# EAGLE board SparkFun RTK Facet - External Connector-Panel (EAGLE 9.6.2), part 1 of 2
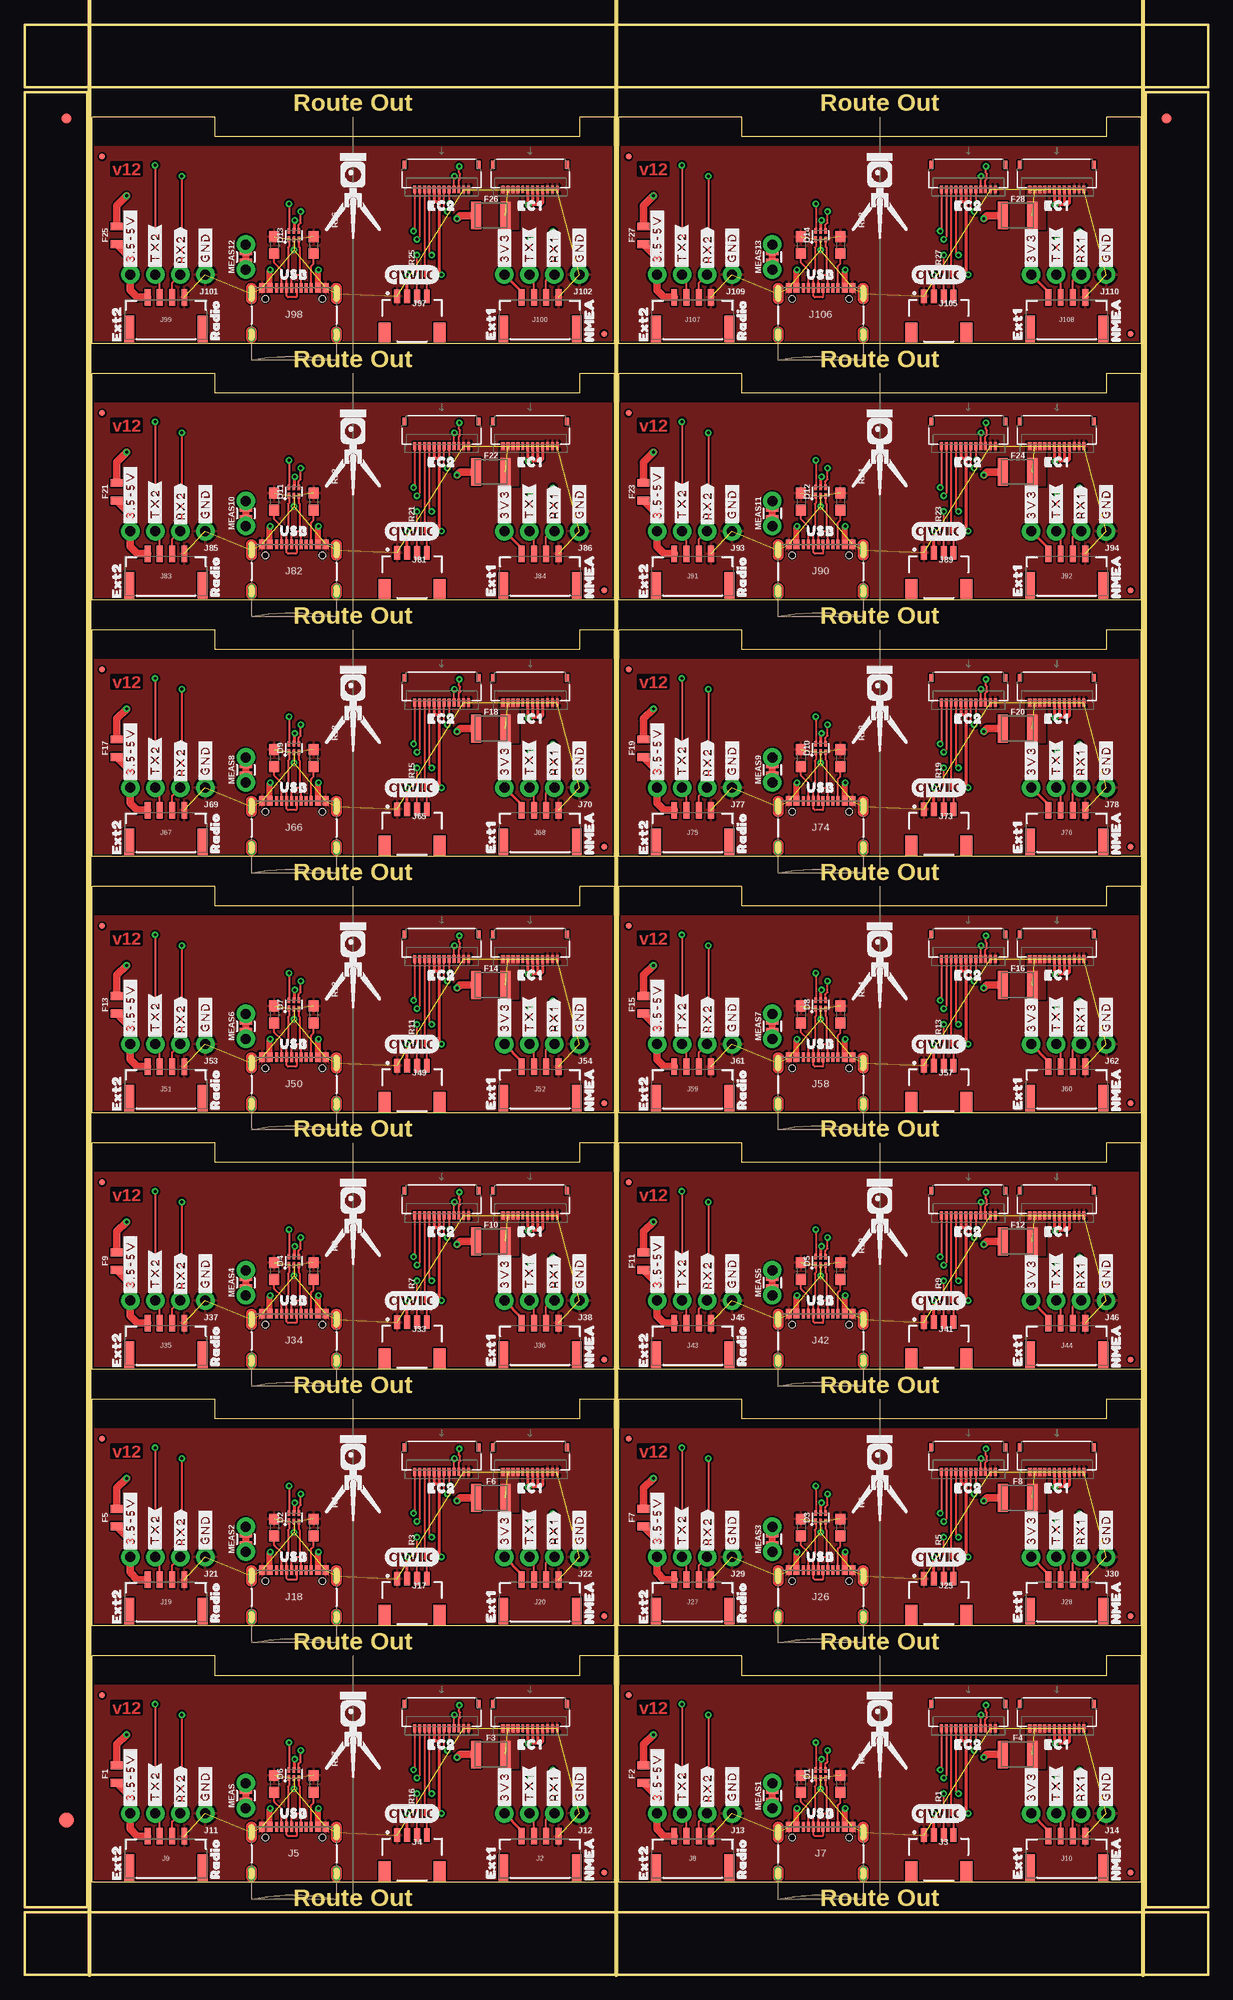
[diagram p0: board, top side]
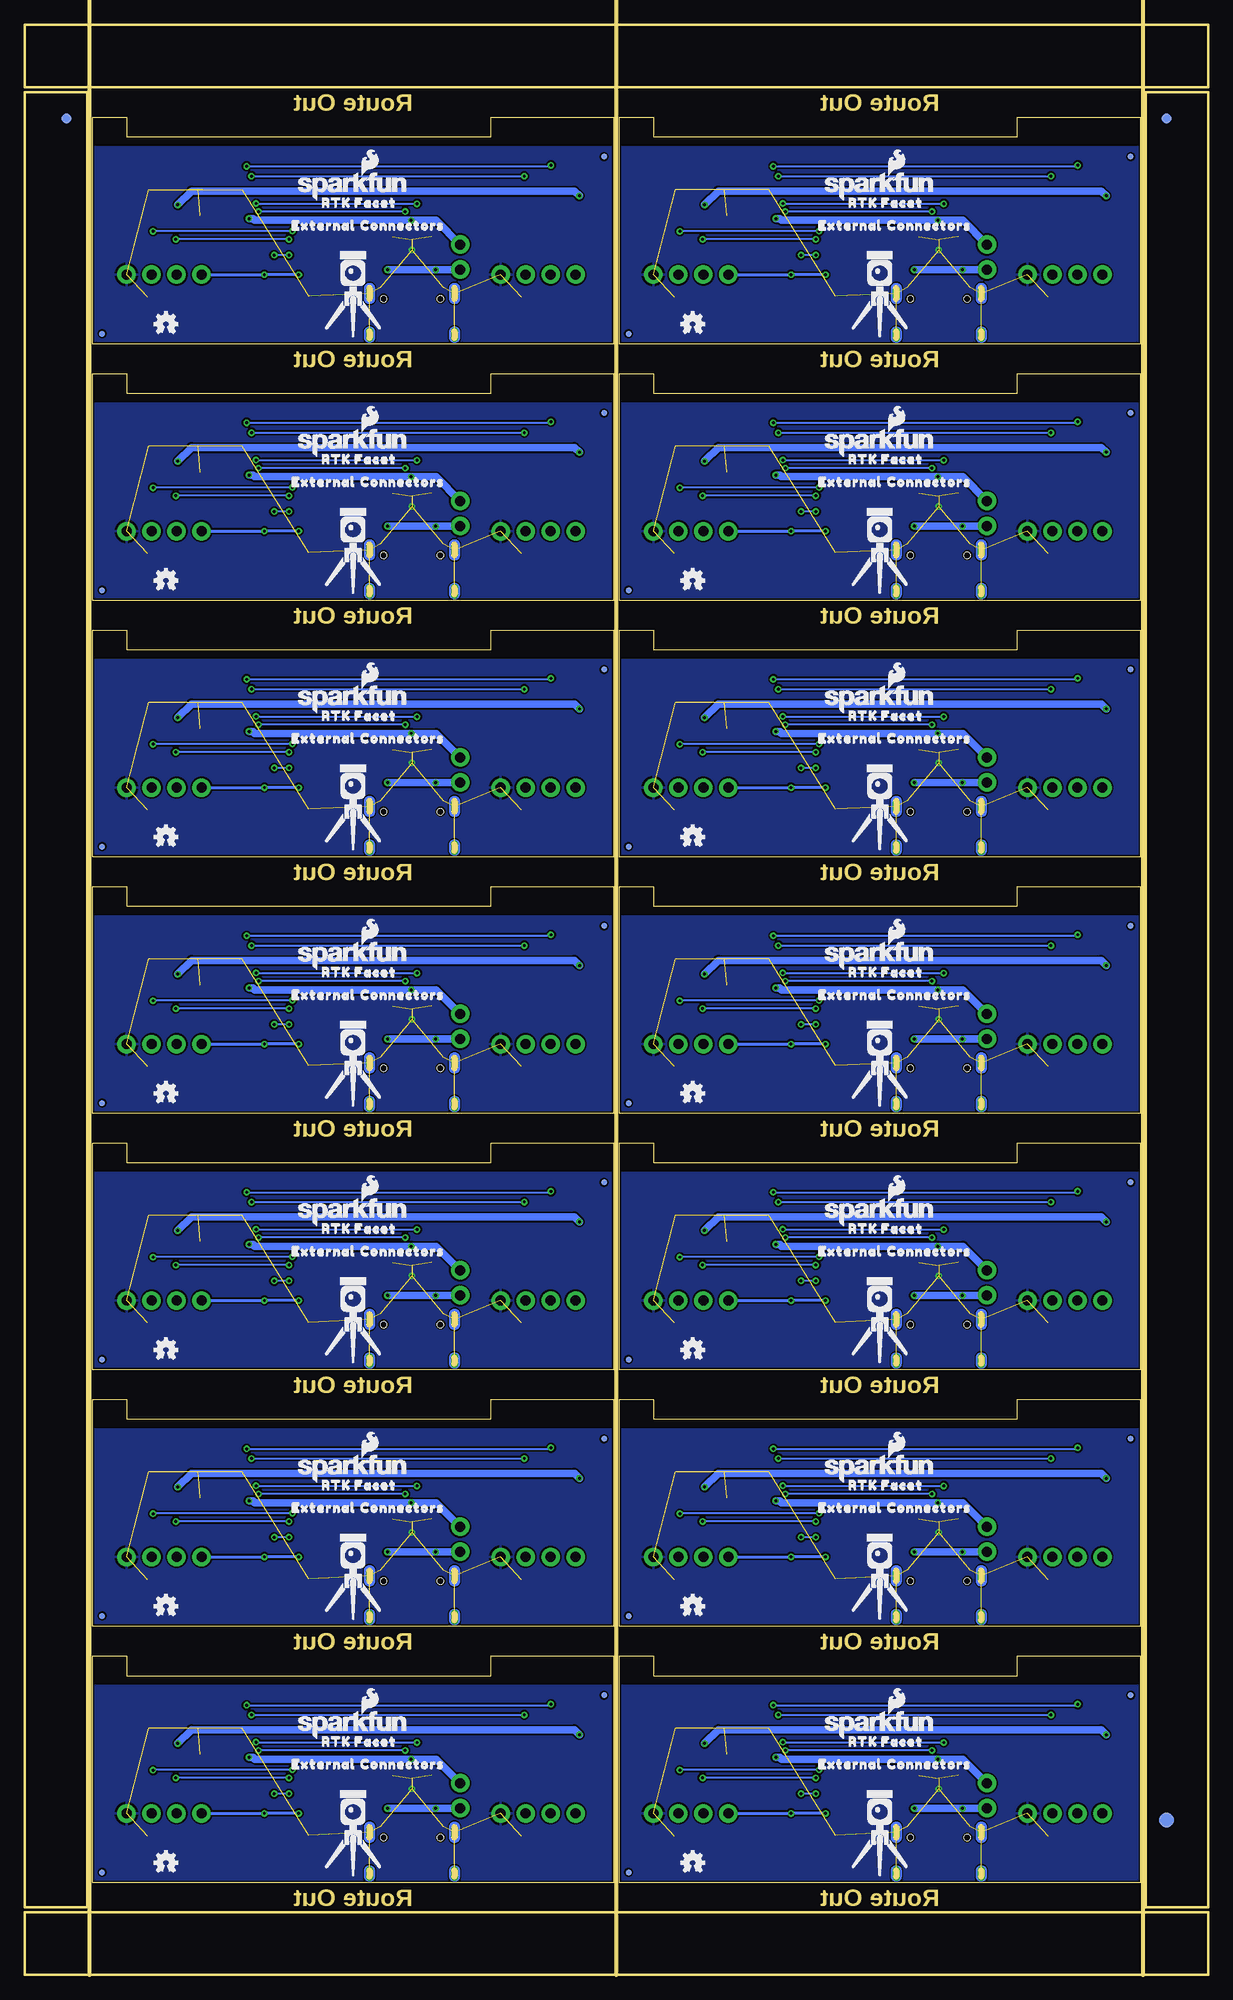
[diagram p1: board, bottom side, seen from below]

Size 120.22 x 198.08 mm. Coordinates in mm from the lower left corner, seen from the top.
Outline: 59.86,32.4 59.86,9.4 6.86,9.4 6.86,32.4 19.36,32.4 19.36,30.4 56.36,30.4 56.36,32.4 59.86,32.4
Outline: 113.37,32.4 113.37,9.4 60.37,9.4 60.37,32.4 72.87,32.4 72.87,30.4 109.87,30.4 109.87,32.4 113.37,32.4
Outline: 59.86,58.45 59.86,35.45 6.86,35.45 6.86,58.45 19.36,58.45 19.36,56.45 56.36,56.45 56.36,58.45 59.86,58.45
Outline: 113.37,58.45 113.37,35.45 60.37,35.45 60.37,58.45 72.87,58.45 72.87,56.45 109.87,56.45 109.87,58.45 113.37,58.45
Outline: 59.86,84.49 59.86,61.49 6.86,61.49 6.86,84.49 19.36,84.49 19.36,82.49 56.36,82.49 56.36,84.49 59.86,84.49
Outline: 113.37,84.49 113.37,61.49 60.37,61.49 60.37,84.49 72.87,84.49 72.87,82.49 109.87,82.49 109.87,84.49 113.37,84.49
Outline: 59.86,110.54 59.86,87.54 6.86,87.54 6.86,110.54 19.36,110.54 19.36,108.54 56.36,108.54 56.36,110.54 59.86,110.54
Outline: 113.37,110.54 113.37,87.54 60.37,87.54 60.37,110.54 72.87,110.54 72.87,108.54 109.87,108.54 109.87,110.54 113.37,110.54
Outline: 59.86,136.59 59.86,113.59 6.86,113.59 6.86,136.59 19.36,136.59 19.36,134.59 56.36,134.59 56.36,136.59 59.86,136.59
Outline: 113.37,136.59 113.37,113.59 60.37,113.59 60.37,136.59 72.87,136.59 72.87,134.59 109.87,134.59 109.87,136.59 113.37,136.59
Outline: 59.86,162.64 59.86,139.64 6.86,139.64 6.86,162.64 19.36,162.64 19.36,160.64 56.36,160.64 56.36,162.64 59.86,162.64
Outline: 113.37,162.64 113.37,139.64 60.37,139.64 60.37,162.64 72.87,162.64 72.87,160.64 109.87,160.64 109.87,162.64 113.37,162.64
Outline: 59.86,188.69 59.86,165.69 6.86,165.69 6.86,188.69 19.36,188.69 19.36,186.69 56.36,186.69 56.36,188.69 59.86,188.69
Outline: 113.37,188.69 113.37,165.69 60.37,165.69 60.37,188.69 72.87,188.69 72.87,186.69 109.87,186.69 109.87,188.69 113.37,188.69
Outline: 0,6.35 120.22,6.35 120.22,0 0,0 0,6.35
Outline: 113.87,191.23 120.22,191.23 120.22,6.86 113.87,6.86 113.87,191.23
Outline: 0,198.08 120.22,198.08 120.22,191.73 0,191.73 0,198.08
Outline: 0,191.23 6.35,191.23 6.35,6.86 0,6.86 0,191.23
Copper layers (1*16): Top 0.035mm / dielectric 1.5mm / Bottom 0.035mm
Design rules "SparkFun RTK Facet - External Connector": minimum track width 7mil, minimum drill 0.3mm, track to track 7mil, track to pad 7mil, pad to pad 7mil, via to via 7mil, smd to smd 7mil, copper to edge 7mil, drill to drill 7mil, minimum pad ring 7mil, minimum via ring 7mil, stop-mask expansion 4mil, vias tented up to drill 25mil, thermal gap 10mil
Net classes: 1 power: width 0.305 mm
tKeepout: area 6.9,9.4 to 8.9,29.4; area 60.4,9.4 to 62.4,29.4; area 6.9,35.4 to 8.9,55.4; area 60.4,35.4 to 62.4,55.4; area 6.9,61.5 to 8.9,81.5; area 60.4,61.5 to 62.4,81.5; area 6.9,87.5 to 8.9,107.5; area 60.4,87.5 to 62.4,107.5; area 6.9,113.6 to 8.9,133.6; area 60.4,113.6 to 62.4,133.6; area 6.9,139.6 to 8.9,159.6; area 60.4,139.6 to 62.4,159.6; area 6.9,165.7 to 8.9,185.7; area 60.4,165.7 to 62.4,185.7
bKeepout: area 54.4,9.4 to 56.4,29.4; area 6.9,9.4 to 8.9,29.4; area 107.9,9.4 to 109.9,29.4; area 60.4,9.4 to 62.4,29.4; area 54.4,35.4 to 56.4,55.4; area 6.9,35.4 to 8.9,55.4; area 107.9,35.4 to 109.9,55.4; area 60.4,35.4 to 62.4,55.4; area 54.4,61.5 to 56.4,81.5; area 6.9,61.5 to 8.9,81.5; area 107.9,61.5 to 109.9,81.5; area 60.4,61.5 to 62.4,81.5; area 54.4,87.5 to 56.4,107.5; area 6.9,87.5 to 8.9,107.5; area 107.9,87.5 to 109.9,107.5; area 60.4,87.5 to 62.4,107.5; area 54.4,113.6 to 56.4,133.6; area 6.9,113.6 to 8.9,133.6; area 107.9,113.6 to 109.9,133.6; area 60.4,113.6 to 62.4,133.6; area 54.4,139.6 to 56.4,159.6; area 6.9,139.6 to 8.9,159.6; area 107.9,139.6 to 109.9,159.6; area 60.4,139.6 to 62.4,159.6; area 54.4,165.7 to 56.4,185.7; area 6.9,165.7 to 8.9,185.7; area 107.9,165.7 to 109.9,185.7; area 60.4,165.7 to 62.4,185.7
Milling: 3 lines

## Footprints (pad centres in the part's own frame; a part is rotated, then mirrored left to right if it is on the bottom)
SOT886 = smd 0.61 x 0.25: 1 -0.405,0.5 | smd 0.56 x 0.25: 2 -0.43,0; 3 -0.43,-0.5; 4 0.43,-0.5; 5 0.43,0; 6 0.43,0.5
FIDUCIAL-1X2 = smd 1 x 1: 1 0,0
FIDUCIAL-1.5X3 = smd 1.5 x 1.5: 1 0,0
0805 = smd 0.8 x 1.2: 1 -0.9,0; 2 0.9,0
1210 = smd 1 x 2.8: 1 -1.5,0; 2 1.5,0
FPC_12_DOUBLESIDED_BACKFLIP = smd 0.3 x 0.8: 1 -2.75,1.35; 2 -2.25,1.35; 3 -1.75,1.35; 4 -1.25,1.35; 5 -0.75,1.35; 6 -0.25,1.35; 7 0.25,1.35; 8 0.75,1.35; 9 1.25,1.35; 10 1.75,1.35; 11 2.25,1.35; 12 2.75,1.35 | smd 0.4 x 0.8: MP1 -3.75,-1.15; MP2 3.75,-1.15
JST-4-SMD-1.25MM-LOCKING = smd 0.6 x 1.7: 1 -1.875,3.3; 2 -0.625,3.3; 3 0.625,3.3; 4 1.875,3.3 | smd 1 x 2.7: NC1 3.725,0.1; NC2 -3.725,0.1
JST04_1MM_RA = smd 0.6 x 1.35: 1 -1.5,0; 2 -0.5,0; 3 0.5,0; 4 1.5,0 | smd 1.2 x 2: NC1 2.8,-3.675; NC2 -2.8,-3.675
USB-C-16P-2LAYER-PADS = smd 0.3 x 1: A5 -1.25,-0.34; A6 -0.25,-0.34; A7 0.25,-0.34; A8 1.25,-0.34; B5 1.75,-0.34; B6 0.75,-0.34; B7 -0.75,-0.34; B8 -1.75,-0.34 | smd 0.6 x 1: GND -3.225,-0.34; GND2 3.225,-0.34; VBUS1 -2.45,-0.34; VBUS2 2.45,-0.34 | drill 0.4 pad 0.6 long: SHLD1 -4.318,-0.915; SHLD2 4.318,-0.915; SHLD3 -4.318,-5.095; SHLD4 4.318,-5.095 | hole 0.65: -2.89,-1.445; 2.89,-1.445
1X04_NO_SILK = drill 1.016 pad 1.88: 1 0,0; 2 2.54,0; 3 5.08,0; 4 7.62,0
FIDUCIAL-MICRO = smd 0.635 x 0.635: 1 0,0
COMBO-JUMPER_2_NC_TRACE = smd 0.635 x 1.27: 1 -0.508,0; 2 0.508,0 | drill 1.016 pad 1.88: 3 -1.27,0; 4 1.27,0
0603 = smd 1.1 x 1: 1 -0.85,0; 2 0.85,0

## Placement (x,y rotation side)
D1  PRTR5V0U2F  [SOT886]  80.87,20.4 90 top
D2  PRTR5V0U2F  [SOT886]  27.36,46.45 90 top
D3  PRTR5V0U2F  [SOT886]  80.87,46.45 90 top
D4  PRTR5V0U2F  [SOT886]  27.36,72.49 90 top
D5  PRTR5V0U2F  [SOT886]  80.87,72.49 90 top
D6  PRTR5V0U2F  [SOT886]  27.36,20.4 90 top
D7  PRTR5V0U2F  [SOT886]  27.36,98.54 90 top
D8  PRTR5V0U2F  [SOT886]  80.87,98.54 90 top
D9  PRTR5V0U2F  [SOT886]  27.36,124.59 90 top
D10  PRTR5V0U2F  [SOT886]  80.87,124.59 90 top
D11  PRTR5V0U2F  [SOT886]  27.36,150.64 90 top
D12  PRTR5V0U2F  [SOT886]  80.87,150.64 90 top
D13  PRTR5V0U2F  [SOT886]  27.36,176.69 90 top
D14  PRTR5V0U2F  [SOT886]  80.87,176.69 90 top
E$1  [FIDUCIAL-1X2]  4.23,188.56 0 top
E$2  [FIDUCIAL-1X2]  4.23,188.56 0 bottom
E$3  [FIDUCIAL-1X2]  115.99,188.56 0 top
E$4  [FIDUCIAL-1X2]  115.99,188.56 0 bottom
E$5  [FIDUCIAL-1.5X3]  4.23,15.75 0 top
E$6  [FIDUCIAL-1.5X3]  4.23,15.75 0 bottom
F1  6V 0.5A  [0805]  9.36,20.4 90 top
F2  6V 0.5A  [0805]  62.87,20.4 90 top
F3  6V/2A  [1210]  47.36,22.4 0 top
F4  6V/2A  [1210]  100.87,22.4 0 top
F5  6V 0.5A  [0805]  9.36,46.45 90 top
F6  6V/2A  [1210]  47.36,48.45 0 top
F7  6V 0.5A  [0805]  62.87,46.45 90 top
F8  6V/2A  [1210]  100.87,48.45 0 top
F9  6V 0.5A  [0805]  9.36,72.49 90 top
F10  6V/2A  [1210]  47.36,74.49 0 top
F11  6V 0.5A  [0805]  62.87,72.49 90 top
F12  6V/2A  [1210]  100.87,74.49 0 top
F13  6V 0.5A  [0805]  9.36,98.54 90 top
F14  6V/2A  [1210]  47.36,100.54 0 top
F15  6V 0.5A  [0805]  62.87,98.54 90 top
F16  6V/2A  [1210]  100.87,100.54 0 top
F17  6V 0.5A  [0805]  9.36,124.59 90 top
F18  6V/2A  [1210]  47.36,126.59 0 top
F19  6V 0.5A  [0805]  62.87,124.59 90 top
F20  6V/2A  [1210]  100.87,126.59 0 top
F21  6V 0.5A  [0805]  9.36,150.64 90 top
F22  6V/2A  [1210]  47.36,152.64 0 top
F23  6V 0.5A  [0805]  62.87,150.64 90 top
F24  6V/2A  [1210]  100.87,152.64 0 top
F25  6V 0.5A  [0805]  9.36,176.69 90 top
F26  6V/2A  [1210]  47.36,178.69 0 top
F27  6V 0.5A  [0805]  62.87,176.69 90 top
F28  6V/2A  [1210]  100.87,178.69 0 top
J1  FPC_12_0.5MM_BACKFLIP  [FPC_12_DOUBLESIDED_BACKFLIP]  51.36,26.4 180 top
J2  [JST-4-SMD-1.25MM-LOCKING]  52.36,10.8 0 top
J3  Qwiic  [JST04_1MM_RA]  92.87,14.2 0 top
J4  Qwiic  [JST04_1MM_RA]  39.36,14.2 0 top
J5  u-blox USB  [USB-C-16P-2LAYER-PADS]  27.36,15.4 0 top
J6  FPC_12_0.5MM_BACKFLIP  [FPC_12_DOUBLESIDED_BACKFLIP]  42.36,26.4 180 top
J7  u-blox USB  [USB-C-16P-2LAYER-PADS]  80.87,15.4 0 top
J8  [JST-4-SMD-1.25MM-LOCKING]  67.87,10.8 0 top
J9  [JST-4-SMD-1.25MM-LOCKING]  14.36,10.8 0 top
J10  [JST-4-SMD-1.25MM-LOCKING]  105.87,10.8 0 top
J11  [1X04_NO_SILK]  18.36,16.4 180 top
J12  [1X04_NO_SILK]  56.36,16.4 180 top
J13  [1X04_NO_SILK]  71.87,16.4 180 top
J14  [1X04_NO_SILK]  109.87,16.4 180 top
J15  FPC_12_0.5MM_BACKFLIP  [FPC_12_DOUBLESIDED_BACKFLIP]  104.87,26.4 180 top
J16  FPC_12_0.5MM_BACKFLIP  [FPC_12_DOUBLESIDED_BACKFLIP]  95.87,26.4 180 top
J17  Qwiic  [JST04_1MM_RA]  39.36,40.25 0 top
J18  u-blox USB  [USB-C-16P-2LAYER-PADS]  27.36,41.45 0 top
J19  [JST-4-SMD-1.25MM-LOCKING]  14.36,36.85 0 top
J20  [JST-4-SMD-1.25MM-LOCKING]  52.36,36.85 0 top
J21  [1X04_NO_SILK]  18.36,42.45 180 top
J22  [1X04_NO_SILK]  56.36,42.45 180 top
J23  FPC_12_0.5MM_BACKFLIP  [FPC_12_DOUBLESIDED_BACKFLIP]  51.36,52.45 180 top
J24  FPC_12_0.5MM_BACKFLIP  [FPC_12_DOUBLESIDED_BACKFLIP]  42.36,52.45 180 top
J25  Qwiic  [JST04_1MM_RA]  92.87,40.25 0 top
J26  u-blox USB  [USB-C-16P-2LAYER-PADS]  80.87,41.45 0 top
J27  [JST-4-SMD-1.25MM-LOCKING]  67.87,36.85 0 top
J28  [JST-4-SMD-1.25MM-LOCKING]  105.87,36.85 0 top
J29  [1X04_NO_SILK]  71.87,42.45 180 top
J30  [1X04_NO_SILK]  109.87,42.45 180 top
J31  FPC_12_0.5MM_BACKFLIP  [FPC_12_DOUBLESIDED_BACKFLIP]  104.87,52.45 180 top
J32  FPC_12_0.5MM_BACKFLIP  [FPC_12_DOUBLESIDED_BACKFLIP]  95.87,52.45 180 top
J33  Qwiic  [JST04_1MM_RA]  39.36,66.29 0 top
J34  u-blox USB  [USB-C-16P-2LAYER-PADS]  27.36,67.49 0 top
J35  [JST-4-SMD-1.25MM-LOCKING]  14.36,62.89 0 top
J36  [JST-4-SMD-1.25MM-LOCKING]  52.36,62.89 0 top
J37  [1X04_NO_SILK]  18.36,68.49 180 top
J38  [1X04_NO_SILK]  56.36,68.49 180 top
J39  FPC_12_0.5MM_BACKFLIP  [FPC_12_DOUBLESIDED_BACKFLIP]  51.36,78.49 180 top
J40  FPC_12_0.5MM_BACKFLIP  [FPC_12_DOUBLESIDED_BACKFLIP]  42.36,78.49 180 top
J41  Qwiic  [JST04_1MM_RA]  92.87,66.29 0 top
J42  u-blox USB  [USB-C-16P-2LAYER-PADS]  80.87,67.49 0 top
J43  [JST-4-SMD-1.25MM-LOCKING]  67.87,62.89 0 top
J44  [JST-4-SMD-1.25MM-LOCKING]  105.87,62.89 0 top
J45  [1X04_NO_SILK]  71.87,68.49 180 top
J46  [1X04_NO_SILK]  109.87,68.49 180 top
J47  FPC_12_0.5MM_BACKFLIP  [FPC_12_DOUBLESIDED_BACKFLIP]  104.87,78.49 180 top
J48  FPC_12_0.5MM_BACKFLIP  [FPC_12_DOUBLESIDED_BACKFLIP]  95.87,78.49 180 top
J49  Qwiic  [JST04_1MM_RA]  39.36,92.34 0 top
J50  u-blox USB  [USB-C-16P-2LAYER-PADS]  27.36,93.54 0 top
J51  [JST-4-SMD-1.25MM-LOCKING]  14.36,88.94 0 top
J52  [JST-4-SMD-1.25MM-LOCKING]  52.36,88.94 0 top
J53  [1X04_NO_SILK]  18.36,94.54 180 top
J54  [1X04_NO_SILK]  56.36,94.54 180 top
J55  FPC_12_0.5MM_BACKFLIP  [FPC_12_DOUBLESIDED_BACKFLIP]  51.36,104.54 180 top
J56  FPC_12_0.5MM_BACKFLIP  [FPC_12_DOUBLESIDED_BACKFLIP]  42.36,104.54 180 top
J57  Qwiic  [JST04_1MM_RA]  92.87,92.34 0 top
J58  u-blox USB  [USB-C-16P-2LAYER-PADS]  80.87,93.54 0 top
J59  [JST-4-SMD-1.25MM-LOCKING]  67.87,88.94 0 top
J60  [JST-4-SMD-1.25MM-LOCKING]  105.87,88.94 0 top
J61  [1X04_NO_SILK]  71.87,94.54 180 top
J62  [1X04_NO_SILK]  109.87,94.54 180 top
J63  FPC_12_0.5MM_BACKFLIP  [FPC_12_DOUBLESIDED_BACKFLIP]  104.87,104.54 180 top
J64  FPC_12_0.5MM_BACKFLIP  [FPC_12_DOUBLESIDED_BACKFLIP]  95.87,104.54 180 top
J65  Qwiic  [JST04_1MM_RA]  39.36,118.39 0 top
J66  u-blox USB  [USB-C-16P-2LAYER-PADS]  27.36,119.59 0 top
J67  [JST-4-SMD-1.25MM-LOCKING]  14.36,114.99 0 top
J68  [JST-4-SMD-1.25MM-LOCKING]  52.36,114.99 0 top
J69  [1X04_NO_SILK]  18.36,120.59 180 top
J70  [1X04_NO_SILK]  56.36,120.59 180 top
J71  FPC_12_0.5MM_BACKFLIP  [FPC_12_DOUBLESIDED_BACKFLIP]  51.36,130.59 180 top
J72  FPC_12_0.5MM_BACKFLIP  [FPC_12_DOUBLESIDED_BACKFLIP]  42.36,130.59 180 top
J73  Qwiic  [JST04_1MM_RA]  92.87,118.39 0 top
J74  u-blox USB  [USB-C-16P-2LAYER-PADS]  80.87,119.59 0 top
J75  [JST-4-SMD-1.25MM-LOCKING]  67.87,114.99 0 top
J76  [JST-4-SMD-1.25MM-LOCKING]  105.87,114.99 0 top
J77  [1X04_NO_SILK]  71.87,120.59 180 top
J78  [1X04_NO_SILK]  109.87,120.59 180 top
J79  FPC_12_0.5MM_BACKFLIP  [FPC_12_DOUBLESIDED_BACKFLIP]  104.87,130.59 180 top
J80  FPC_12_0.5MM_BACKFLIP  [FPC_12_DOUBLESIDED_BACKFLIP]  95.87,130.59 180 top
J81  Qwiic  [JST04_1MM_RA]  39.36,144.44 0 top
J82  u-blox USB  [USB-C-16P-2LAYER-PADS]  27.36,145.64 0 top
J83  [JST-4-SMD-1.25MM-LOCKING]  14.36,141.04 0 top
J84  [JST-4-SMD-1.25MM-LOCKING]  52.36,141.04 0 top
J85  [1X04_NO_SILK]  18.36,146.64 180 top
J86  [1X04_NO_SILK]  56.36,146.64 180 top
J87  FPC_12_0.5MM_BACKFLIP  [FPC_12_DOUBLESIDED_BACKFLIP]  51.36,156.64 180 top
J88  FPC_12_0.5MM_BACKFLIP  [FPC_12_DOUBLESIDED_BACKFLIP]  42.36,156.64 180 top
J89  Qwiic  [JST04_1MM_RA]  92.87,144.44 0 top
J90  u-blox USB  [USB-C-16P-2LAYER-PADS]  80.87,145.64 0 top
J91  [JST-4-SMD-1.25MM-LOCKING]  67.87,141.04 0 top
J92  [JST-4-SMD-1.25MM-LOCKING]  105.87,141.04 0 top
J93  [1X04_NO_SILK]  71.87,146.64 180 top
J94  [1X04_NO_SILK]  109.87,146.64 180 top
J95  FPC_12_0.5MM_BACKFLIP  [FPC_12_DOUBLESIDED_BACKFLIP]  104.87,156.64 180 top
J96  FPC_12_0.5MM_BACKFLIP  [FPC_12_DOUBLESIDED_BACKFLIP]  95.87,156.64 180 top
J97  Qwiic  [JST04_1MM_RA]  39.36,170.49 0 top
J98  u-blox USB  [USB-C-16P-2LAYER-PADS]  27.36,171.69 0 top
J99  [JST-4-SMD-1.25MM-LOCKING]  14.36,167.09 0 top
J100  [JST-4-SMD-1.25MM-LOCKING]  52.36,167.09 0 top
J101  [1X04_NO_SILK]  18.36,172.69 180 top
J102  [1X04_NO_SILK]  56.36,172.69 180 top
J103  FPC_12_0.5MM_BACKFLIP  [FPC_12_DOUBLESIDED_BACKFLIP]  51.36,182.69 180 top
J104  FPC_12_0.5MM_BACKFLIP  [FPC_12_DOUBLESIDED_BACKFLIP]  42.36,182.69 180 top
J105  Qwiic  [JST04_1MM_RA]  92.87,170.49 0 top
J106  u-blox USB  [USB-C-16P-2LAYER-PADS]  80.87,171.69 0 top
J107  [JST-4-SMD-1.25MM-LOCKING]  67.87,167.09 0 top
J108  [JST-4-SMD-1.25MM-LOCKING]  105.87,167.09 0 top
J109  [1X04_NO_SILK]  71.87,172.69 180 top
J110  [1X04_NO_SILK]  109.87,172.69 180 top
J111  FPC_12_0.5MM_BACKFLIP  [FPC_12_DOUBLESIDED_BACKFLIP]  104.87,182.69 180 top
J112  FPC_12_0.5MM_BACKFLIP  [FPC_12_DOUBLESIDED_BACKFLIP]  95.87,182.69 180 top
JP1  FIDUCIALUFIDUCIAL  [FIDUCIAL-MICRO]  112.37,10.4 0 top
JP2  FIDUCIALUFIDUCIAL  [FIDUCIAL-MICRO]  61.37,28.4 0 top
JP3  FIDUCIALUFIDUCIAL  [FIDUCIAL-MICRO]  112.37,10.4 0 bottom
JP4  FIDUCIALUFIDUCIAL  [FIDUCIAL-MICRO]  61.37,28.4 0 bottom
JP5  FIDUCIALUFIDUCIAL  [FIDUCIAL-MICRO]  58.86,36.45 0 top
JP6  FIDUCIALUFIDUCIAL  [FIDUCIAL-MICRO]  7.86,54.45 0 top
JP7  FIDUCIALUFIDUCIAL  [FIDUCIAL-MICRO]  58.86,36.45 0 bottom
JP8  FIDUCIALUFIDUCIAL  [FIDUCIAL-MICRO]  7.86,54.45 0 bottom
JP9  FIDUCIALUFIDUCIAL  [FIDUCIAL-MICRO]  112.37,36.45 0 top
JP10  FIDUCIALUFIDUCIAL  [FIDUCIAL-MICRO]  61.37,54.45 0 top
JP11  FIDUCIALUFIDUCIAL  [FIDUCIAL-MICRO]  112.37,36.45 0 bottom
JP12  FIDUCIALUFIDUCIAL  [FIDUCIAL-MICRO]  61.37,54.45 0 bottom
JP13  FIDUCIALUFIDUCIAL  [FIDUCIAL-MICRO]  58.86,62.49 0 top
JP14  FIDUCIALUFIDUCIAL  [FIDUCIAL-MICRO]  7.86,80.49 0 top
JP15  FIDUCIALUFIDUCIAL  [FIDUCIAL-MICRO]  58.86,62.49 0 bottom
JP16  FIDUCIALUFIDUCIAL  [FIDUCIAL-MICRO]  7.86,80.49 0 bottom
JP17  FIDUCIALUFIDUCIAL  [FIDUCIAL-MICRO]  112.37,62.49 0 top
JP18  FIDUCIALUFIDUCIAL  [FIDUCIAL-MICRO]  61.37,80.49 0 top
JP19  FIDUCIALUFIDUCIAL  [FIDUCIAL-MICRO]  112.37,62.49 0 bottom
JP20  FIDUCIALUFIDUCIAL  [FIDUCIAL-MICRO]  61.37,80.49 0 bottom
JP21  FIDUCIALUFIDUCIAL  [FIDUCIAL-MICRO]  58.86,10.4 0 top
JP22  FIDUCIALUFIDUCIAL  [FIDUCIAL-MICRO]  58.86,88.54 0 top
JP23  FIDUCIALUFIDUCIAL  [FIDUCIAL-MICRO]  7.86,106.54 0 top
JP24  FIDUCIALUFIDUCIAL  [FIDUCIAL-MICRO]  58.86,88.54 0 bottom
JP25  FIDUCIALUFIDUCIAL  [FIDUCIAL-MICRO]  7.86,106.54 0 bottom
JP26  FIDUCIALUFIDUCIAL  [FIDUCIAL-MICRO]  112.37,88.54 0 top
JP27  FIDUCIALUFIDUCIAL  [FIDUCIAL-MICRO]  61.37,106.54 0 top
JP28  FIDUCIALUFIDUCIAL  [FIDUCIAL-MICRO]  112.37,88.54 0 bottom
JP29  FIDUCIALUFIDUCIAL  [FIDUCIAL-MICRO]  61.37,106.54 0 bottom
JP30  FIDUCIALUFIDUCIAL  [FIDUCIAL-MICRO]  58.86,114.59 0 top
JP31  FIDUCIALUFIDUCIAL  [FIDUCIAL-MICRO]  7.86,132.59 0 top
JP32  FIDUCIALUFIDUCIAL  [FIDUCIAL-MICRO]  58.86,114.59 0 bottom
JP33  FIDUCIALUFIDUCIAL  [FIDUCIAL-MICRO]  7.86,132.59 0 bottom
JP34  FIDUCIALUFIDUCIAL  [FIDUCIAL-MICRO]  112.37,114.59 0 top
JP35  FIDUCIALUFIDUCIAL  [FIDUCIAL-MICRO]  61.37,132.59 0 top
JP36  FIDUCIALUFIDUCIAL  [FIDUCIAL-MICRO]  112.37,114.59 0 bottom
JP37  FIDUCIALUFIDUCIAL  [FIDUCIAL-MICRO]  61.37,132.59 0 bottom
JP38  FIDUCIALUFIDUCIAL  [FIDUCIAL-MICRO]  58.86,140.64 0 top
JP39  FIDUCIALUFIDUCIAL  [FIDUCIAL-MICRO]  7.86,158.64 0 top
JP40  FIDUCIALUFIDUCIAL  [FIDUCIAL-MICRO]  58.86,140.64 0 bottom
JP41  FIDUCIALUFIDUCIAL  [FIDUCIAL-MICRO]  7.86,158.64 0 bottom
JP42  FIDUCIALUFIDUCIAL  [FIDUCIAL-MICRO]  112.37,140.64 0 top
JP43  FIDUCIALUFIDUCIAL  [FIDUCIAL-MICRO]  61.37,158.64 0 top
JP44  FIDUCIALUFIDUCIAL  [FIDUCIAL-MICRO]  112.37,140.64 0 bottom
JP45  FIDUCIALUFIDUCIAL  [FIDUCIAL-MICRO]  61.37,158.64 0 bottom
JP46  FIDUCIALUFIDUCIAL  [FIDUCIAL-MICRO]  58.86,166.69 0 top
JP47  FIDUCIALUFIDUCIAL  [FIDUCIAL-MICRO]  7.86,184.69 0 top
JP48  FIDUCIALUFIDUCIAL  [FIDUCIAL-MICRO]  58.86,166.69 0 bottom
JP49  FIDUCIALUFIDUCIAL  [FIDUCIAL-MICRO]  7.86,184.69 0 bottom
JP50  FIDUCIALUFIDUCIAL  [FIDUCIAL-MICRO]  112.37,166.69 0 top
JP51  FIDUCIALUFIDUCIAL  [FIDUCIAL-MICRO]  61.37,184.69 0 top
JP52  FIDUCIALUFIDUCIAL  [FIDUCIAL-MICRO]  112.37,166.69 0 bottom
JP53  FIDUCIALUFIDUCIAL  [FIDUCIAL-MICRO]  61.37,184.69 0 bottom
JP61  FIDUCIALUFIDUCIAL  [FIDUCIAL-MICRO]  7.86,28.4 0 top
JP71  FIDUCIALUFIDUCIAL  [FIDUCIAL-MICRO]  58.86,10.4 0 bottom
JP81  FIDUCIALUFIDUCIAL  [FIDUCIAL-MICRO]  7.86,28.4 0 bottom
LOGO1  OSHW-LOGOMINI  [OSHW-LOGO-MINI]  52.36,11.4 0 bottom
LOGO2  SFE_LOGO_NAME_FLAME.1_INCH  [SFE_LOGO_NAME_FLAME_.1]  33.36,25.4 0 bottom
LOGO3  QWIIC_LOGO_CONNECTOR  [QWIIC_5.5MM]  39.36,16.4 0 top
LOGO4  OSHW-LOGOMINI  [OSHW-LOGO-MINI]  105.87,11.4 0 bottom
LOGO5  SFE_LOGO_NAME_FLAME.1_INCH  [SFE_LOGO_NAME_FLAME_.1]  86.87,25.4 0 bottom
LOGO6  QWIIC_LOGO_CONNECTOR  [QWIIC_5.5MM]  92.87,16.4 0 top
LOGO7  OSHW-LOGOMINI  [OSHW-LOGO-MINI]  52.36,37.45 0 bottom
LOGO8  SFE_LOGO_NAME_FLAME.1_INCH  [SFE_LOGO_NAME_FLAME_.1]  33.36,51.45 0 bottom
LOGO9  QWIIC_LOGO_CONNECTOR  [QWIIC_5.5MM]  39.36,42.45 0 top
LOGO10  OSHW-LOGOMINI  [OSHW-LOGO-MINI]  105.87,37.45 0 bottom
LOGO11  SFE_LOGO_NAME_FLAME.1_INCH  [SFE_LOGO_NAME_FLAME_.1]  86.87,51.45 0 bottom
LOGO12  QWIIC_LOGO_CONNECTOR  [QWIIC_5.5MM]  92.87,42.45 0 top
LOGO13  OSHW-LOGOMINI  [OSHW-LOGO-MINI]  52.36,63.49 0 bottom
LOGO14  SFE_LOGO_NAME_FLAME.1_INCH  [SFE_LOGO_NAME_FLAME_.1]  33.36,77.49 0 bottom
LOGO15  QWIIC_LOGO_CONNECTOR  [QWIIC_5.5MM]  39.36,68.49 0 top
LOGO16  OSHW-LOGOMINI  [OSHW-LOGO-MINI]  105.87,63.49 0 bottom
LOGO17  SFE_LOGO_NAME_FLAME.1_INCH  [SFE_LOGO_NAME_FLAME_.1]  86.87,77.49 0 bottom
LOGO18  QWIIC_LOGO_CONNECTOR  [QWIIC_5.5MM]  92.87,68.49 0 top
LOGO19  OSHW-LOGOMINI  [OSHW-LOGO-MINI]  52.36,89.54 0 bottom
LOGO20  SFE_LOGO_NAME_FLAME.1_INCH  [SFE_LOGO_NAME_FLAME_.1]  33.36,103.54 0 bottom
LOGO21  QWIIC_LOGO_CONNECTOR  [QWIIC_5.5MM]  39.36,94.54 0 top
LOGO22  OSHW-LOGOMINI  [OSHW-LOGO-MINI]  105.87,89.54 0 bottom
LOGO23  SFE_LOGO_NAME_FLAME.1_INCH  [SFE_LOGO_NAME_FLAME_.1]  86.87,103.54 0 bottom
LOGO24  QWIIC_LOGO_CONNECTOR  [QWIIC_5.5MM]  92.87,94.54 0 top
LOGO25  OSHW-LOGOMINI  [OSHW-LOGO-MINI]  52.36,115.59 0 bottom
LOGO26  SFE_LOGO_NAME_FLAME.1_INCH  [SFE_LOGO_NAME_FLAME_.1]  33.36,129.59 0 bottom
LOGO27  QWIIC_LOGO_CONNECTOR  [QWIIC_5.5MM]  39.36,120.59 0 top
LOGO28  OSHW-LOGOMINI  [OSHW-LOGO-MINI]  105.87,115.59 0 bottom
LOGO29  SFE_LOGO_NAME_FLAME.1_INCH  [SFE_LOGO_NAME_FLAME_.1]  86.87,129.59 0 bottom
LOGO30  QWIIC_LOGO_CONNECTOR  [QWIIC_5.5MM]  92.87,120.59 0 top
LOGO31  OSHW-LOGOMINI  [OSHW-LOGO-MINI]  52.36,141.64 0 bottom
LOGO32  SFE_LOGO_NAME_FLAME.1_INCH  [SFE_LOGO_NAME_FLAME_.1]  33.36,155.64 0 bottom
LOGO33  QWIIC_LOGO_CONNECTOR  [QWIIC_5.5MM]  39.36,146.64 0 top
LOGO34  OSHW-LOGOMINI  [OSHW-LOGO-MINI]  105.87,141.64 0 bottom
LOGO35  SFE_LOGO_NAME_FLAME.1_INCH  [SFE_LOGO_NAME_FLAME_.1]  86.87,155.64 0 bottom
LOGO36  QWIIC_LOGO_CONNECTOR  [QWIIC_5.5MM]  92.87,146.64 0 top
LOGO37  OSHW-LOGOMINI  [OSHW-LOGO-MINI]  52.36,167.69 0 bottom
LOGO38  SFE_LOGO_NAME_FLAME.1_INCH  [SFE_LOGO_NAME_FLAME_.1]  33.36,181.69 0 bottom
LOGO39  QWIIC_LOGO_CONNECTOR  [QWIIC_5.5MM]  39.36,172.69 0 top
LOGO40  OSHW-LOGOMINI  [OSHW-LOGO-MINI]  105.87,167.69 0 bottom
LOGO41  SFE_LOGO_NAME_FLAME.1_INCH  [SFE_LOGO_NAME_FLAME_.1]  86.87,181.69 0 bottom
LOGO42  QWIIC_LOGO_CONNECTOR  [QWIIC_5.5MM]  92.87,172.69 0 top
MEAS  [COMBO-JUMPER_2_NC_TRACE]  22.46,18.2 90 top
MEAS1  [COMBO-JUMPER_2_NC_TRACE]  75.97,18.2 90 top
MEAS2  [COMBO-JUMPER_2_NC_TRACE]  22.46,44.25 90 top
MEAS3  [COMBO-JUMPER_2_NC_TRACE]  75.97,44.25 90 top
MEAS4  [COMBO-JUMPER_2_NC_TRACE]  22.46,70.29 90 top
MEAS5  [COMBO-JUMPER_2_NC_TRACE]  75.97,70.29 90 top
MEAS6  [COMBO-JUMPER_2_NC_TRACE]  22.46,96.34 90 top
MEAS7  [COMBO-JUMPER_2_NC_TRACE]  75.97,96.34 90 top
MEAS8  [COMBO-JUMPER_2_NC_TRACE]  22.46,122.39 90 top
MEAS9  [COMBO-JUMPER_2_NC_TRACE]  75.97,122.39 90 top
MEAS10  [COMBO-JUMPER_2_NC_TRACE]  22.46,148.44 90 top
MEAS11  [COMBO-JUMPER_2_NC_TRACE]  75.97,148.44 90 top
MEAS12  [COMBO-JUMPER_2_NC_TRACE]  22.46,174.49 90 top
MEAS13  [COMBO-JUMPER_2_NC_TRACE]  75.97,174.49 90 top
R1  5.1k  [0603]  82.87,19.4 270 top
R2  5.1k  [0603]  78.87,19.4 270 top
R3  5.1k  [0603]  29.36,45.45 270 top
R4  5.1k  [0603]  25.36,45.45 270 top
R5  5.1k  [0603]  82.87,45.45 270 top
R6  5.1k  [0603]  78.87,45.45 270 top
R7  5.1k  [0603]  29.36,71.49 270 top
R8  5.1k  [0603]  25.36,71.49 270 top
R9  5.1k  [0603]  82.87,71.49 270 top
R10  5.1k  [0603]  78.87,71.49 270 top
R11  5.1k  [0603]  29.36,97.54 270 top
R12  5.1k  [0603]  25.36,97.54 270 top
R13  5.1k  [0603]  82.87,97.54 270 top
R14  5.1k  [0603]  78.87,97.54 270 top
R15  5.1k  [0603]  29.36,123.59 270 top
R16  5.1k  [0603]  29.36,19.4 270 top
R17  5.1k  [0603]  25.36,19.4 270 top
R18  5.1k  [0603]  25.36,123.59 270 top
R19  5.1k  [0603]  82.87,123.59 270 top
R20  5.1k  [0603]  78.87,123.59 270 top
R21  5.1k  [0603]  29.36,149.64 270 top
R22  5.1k  [0603]  25.36,149.64 270 top
R23  5.1k  [0603]  82.87,149.64 270 top
R24  5.1k  [0603]  78.87,149.64 270 top
R25  5.1k  [0603]  29.36,175.69 270 top
R26  5.1k  [0603]  25.36,175.69 270 top
R27  5.1k  [0603]  82.87,175.69 270 top
R28  5.1k  [0603]  78.87,175.69 270 top
U$1  [USB0]  27.36,16.4 0 top
U$2  [CONNECTORS1]  28.36,21.4 0 bottom
U$3  [RTK5#SVG0]  33.36,24.4 0 top
U$4  [EXT10]  47.36,11.4 90 top
U$5  [#3V3#0]  48.76,16.9 90 top
U$6  [EXT22]  9.36,11.4 90 top
U$7  [NMEA1]  57.36,11.8 90 top
U$8  [EC10]  51.36,23.4 0 top
U$9  [EXTERNAL0]  36.36,21.4 0 bottom
U$10  [#RX2#2]  69.37,16.8 90 top
U$11  [EC21]  42.36,23.4 0 top
U$12  [RADIO3]  19.36,11.8 90 top
U$13  [RTK5#SVG0]  33.36,14.4 0 bottom
U$14  [RTK_FACET0]  32.76,23.7 0 bottom
U$15  [#TX2#1]  66.77,16.9 90 top
U$16  [#GND#0]  71.87,16.9 90 top
U$17  [#3#5#5V#0]  64.27,16.9 90 top
U$18  [#3V3#0]  102.27,16.9 90 top
U$19  [#TX1#1]  104.77,16.9 90 top
U$20  [#RX1#2]  107.27,16.9 90 top
U$21  [#GND#0]  109.87,16.9 90 top
U$22  [CONNECTORS1]  81.87,21.4 0 bottom
U$23  [#3#5#5V#0]  10.76,16.9 90 top
U$24  [EXTERNAL0]  89.87,21.4 0 bottom
U$25  [EC10]  104.87,23.4 0 top
U$26  [EC21]  95.87,23.4 0 top
U$27  [USB0]  80.87,16.4 0 top
U$28  [EXT10]  100.87,11.4 90 top
U$29  [EXT22]  62.87,11.4 90 top
U$30  [NMEA1]  110.87,11.8 90 top
U$31  [RADIO3]  72.87,11.8 90 top
U$32  [RTK5#SVG0]  86.87,24.4 0 top
U$33  [RTK5#SVG0]  86.87,14.4 0 bottom
U$34  [RTK_FACET0]  86.27,23.7 0 bottom
U$35  [#RX2#2]  15.86,42.85 90 top
U$36  [#TX2#1]  13.26,42.95 90 top
U$37  [#GND#0]  18.36,42.95 90 top
U$38  [#GND#0]  18.36,16.9 90 top
U$39  [#RX2#2]  15.86,16.8 90 top
U$40  [#TX2#1]  13.26,16.9 90 top
U$41  [#3#5#5V#0]  10.76,42.95 90 top
U$42  [#3V3#0]  48.76,42.95 90 top
U$43  [#TX1#1]  51.26,42.95 90 top
U$44  [#RX1#2]  53.76,42.95 90 top
U$45  [#GND#0]  56.36,42.95 90 top
U$46  [CONNECTORS1]  28.36,47.45 0 bottom
U$47  [EXTERNAL0]  36.36,47.45 0 bottom
U$48  [EC10]  51.36,49.45 0 top
U$49  [EC21]  42.36,49.45 0 top
U$50  [USB0]  27.36,42.45 0 top
U$51  [EXT10]  47.36,37.45 90 top
U$52  [EXT22]  9.36,37.45 90 top
U$53  [NMEA1]  57.36,37.85 90 top
U$54  [RADIO3]  19.36,37.85 90 top
U$55  [RTK5#SVG0]  33.36,50.45 0 top
U$56  [RTK5#SVG0]  33.36,40.45 0 bottom
U$57  [RTK_FACET0]  32.76,49.75 0 bottom
U$58  [#RX2#2]  69.37,42.85 90 top
U$59  [#TX2#1]  66.77,42.95 90 top
U$60  [#GND#0]  71.87,42.95 90 top
U$61  [#3#5#5V#0]  64.27,42.95 90 top
U$62  [#3V3#0]  102.27,42.95 90 top
U$63  [#TX1#1]  104.77,42.95 90 top
U$64  [#RX1#2]  107.27,42.95 90 top
U$65  [#TX1#1]  51.26,16.9 90 top
U$66  [#GND#0]  109.87,42.95 90 top
U$67  [CONNECTORS1]  81.87,47.45 0 bottom
U$68  [#RX1#2]  53.76,16.9 90 top
U$69  [EXTERNAL0]  89.87,47.45 0 bottom
U$70  [EC10]  104.87,49.45 0 top
U$71  [EC21]  95.87,49.45 0 top
U$72  [USB0]  80.87,42.45 0 top
U$73  [EXT10]  100.87,37.45 90 top
U$74  [EXT22]  62.87,37.45 90 top
U$75  [NMEA1]  110.87,37.85 90 top
U$76  [RADIO3]  72.87,37.85 90 top
U$77  [RTK5#SVG0]  86.87,50.45 0 top
U$78  [RTK5#SVG0]  86.87,40.45 0 bottom
U$79  [RTK_FACET0]  86.27,49.75 0 bottom
U$80  [#RX2#2]  15.86,68.89 90 top
U$81  [#TX2#1]  13.26,68.99 90 top
U$82  [#GND#0]  56.36,16.9 90 top
U$83  [#GND#0]  18.36,68.99 90 top
U$84  [#3#5#5V#0]  10.76,68.99 90 top
U$85  [#3V3#0]  48.76,68.99 90 top
U$86  [#TX1#1]  51.26,68.99 90 top
U$87  [#RX1#2]  53.76,68.99 90 top
U$88  [#GND#0]  56.36,68.99 90 top
U$89  [CONNECTORS1]  28.36,73.49 0 bottom
U$90  [EXTERNAL0]  36.36,73.49 0 bottom
U$91  [EC10]  51.36,75.49 0 top
U$92  [EC21]  42.36,75.49 0 top
U$93  [USB0]  27.36,68.49 0 top
U$94  [EXT10]  47.36,63.49 90 top
U$95  [EXT22]  9.36,63.49 90 top
U$96  [NMEA1]  57.36,63.89 90 top
U$97  [RADIO3]  19.36,63.89 90 top
U$98  [RTK5#SVG0]  33.36,76.49 0 top
U$99  [RTK5#SVG0]  33.36,66.49 0 bottom
U$100  [RTK_FACET0]  32.76,75.79 0 bottom
U$101  [#RX2#2]  69.37,68.89 90 top
U$102  [#TX2#1]  66.77,68.99 90 top
U$103  [#GND#0]  71.87,68.99 90 top
U$104  [#3#5#5V#0]  64.27,68.99 90 top
U$105  [#3V3#0]  102.27,68.99 90 top
U$106  [#TX1#1]  104.77,68.99 90 top
U$107  [#RX1#2]  107.27,68.99 90 top
U$108  [#GND#0]  109.87,68.99 90 top
U$109  [CONNECTORS1]  81.87,73.49 0 bottom
U$110  [EXTERNAL0]  89.87,73.49 0 bottom
U$111  [EC10]  104.87,75.49 0 top
U$112  [EC21]  95.87,75.49 0 top
U$113  [USB0]  80.87,68.49 0 top
U$114  [EXT10]  100.87,63.49 90 top
U$115  [EXT22]  62.87,63.49 90 top
U$116  [NMEA1]  110.87,63.89 90 top
U$117  [RADIO3]  72.87,63.89 90 top
U$118  [RTK5#SVG0]  86.87,76.49 0 top
U$119  [RTK5#SVG0]  86.87,66.49 0 bottom
U$120  [RTK_FACET0]  86.27,75.79 0 bottom
U$121  [#RX2#2]  15.86,94.94 90 top
U$122  [#TX2#1]  13.26,95.04 90 top
U$123  [#GND#0]  18.36,95.04 90 top
U$124  [#3#5#5V#0]  10.76,95.04 90 top
U$125  [#3V3#0]  48.76,95.04 90 top
U$126  [#TX1#1]  51.26,95.04 90 top
U$127  [#RX1#2]  53.76,95.04 90 top
U$128  [#GND#0]  56.36,95.04 90 top
U$129  [CONNECTORS1]  28.36,99.54 0 bottom
U$130  [EXTERNAL0]  36.36,99.54 0 bottom
U$131  [EC10]  51.36,101.54 0 top
U$132  [EC21]  42.36,101.54 0 top
U$133  [USB0]  27.36,94.54 0 top
U$134  [EXT10]  47.36,89.54 90 top
U$135  [EXT22]  9.36,89.54 90 top
U$136  [NMEA1]  57.36,89.94 90 top
U$137  [RADIO3]  19.36,89.94 90 top
U$138  [RTK5#SVG0]  33.36,102.54 0 top
U$139  [RTK5#SVG0]  33.36,92.54 0 bottom
U$140  [RTK_FACET0]  32.76,101.84 0 bottom
U$141  [#RX2#2]  69.37,94.94 90 top
U$142  [#TX2#1]  66.77,95.04 90 top
U$143  [#GND#0]  71.87,95.04 90 top
U$144  [#3#5#5V#0]  64.27,95.04 90 top
U$145  [#3V3#0]  102.27,95.04 90 top
U$146  [#TX1#1]  104.77,95.04 90 top
U$147  [#RX1#2]  107.27,95.04 90 top
U$148  [#GND#0]  109.87,95.04 90 top
U$149  [CONNECTORS1]  81.87,99.54 0 bottom
U$150  [EXTERNAL0]  89.87,99.54 0 bottom
U$151  [EC10]  104.87,101.54 0 top
U$152  [EC21]  95.87,101.54 0 top
U$153  [USB0]  80.87,94.54 0 top
U$154  [EXT10]  100.87,89.54 90 top
U$155  [EXT22]  62.87,89.54 90 top
U$156  [NMEA1]  110.87,89.94 90 top
U$157  [RADIO3]  72.87,89.94 90 top
U$158  [RTK5#SVG0]  86.87,102.54 0 top
U$159  [RTK5#SVG0]  86.87,92.54 0 bottom
U$160  [RTK_FACET0]  86.27,101.84 0 bottom
U$161  [#RX2#2]  15.86,120.99 90 top
U$162  [#TX2#1]  13.26,121.09 90 top
U$163  [#GND#0]  18.36,121.09 90 top
U$164  [#3#5#5V#0]  10.76,121.09 90 top
U$165  [#3V3#0]  48.76,121.09 90 top
U$166  [#TX1#1]  51.26,121.09 90 top
U$167  [#RX1#2]  53.76,121.09 90 top
U$168  [#GND#0]  56.36,121.09 90 top
U$169  [CONNECTORS1]  28.36,125.59 0 bottom
U$170  [EXTERNAL0]  36.36,125.59 0 bottom
U$171  [EC10]  51.36,127.59 0 top
U$172  [EC21]  42.36,127.59 0 top
U$173  [USB0]  27.36,120.59 0 top
U$174  [EXT10]  47.36,115.59 90 top
U$175  [EXT22]  9.36,115.59 90 top
U$176  [NMEA1]  57.36,115.99 90 top
U$177  [RADIO3]  19.36,115.99 90 top
U$178  [RTK5#SVG0]  33.36,128.59 0 top
U$179  [RTK5#SVG0]  33.36,118.59 0 bottom
U$180  [RTK_FACET0]  32.76,127.89 0 bottom
U$181  [#RX2#2]  69.37,120.99 90 top
U$182  [#TX2#1]  66.77,121.09 90 top
U$183  [#GND#0]  71.87,121.09 90 top
U$184  [#3#5#5V#0]  64.27,121.09 90 top
U$185  [#3V3#0]  102.27,121.09 90 top
U$186  [#TX1#1]  104.77,121.09 90 top
U$187  [#RX1#2]  107.27,121.09 90 top
U$188  [#GND#0]  109.87,121.09 90 top
U$189  [CONNECTORS1]  81.87,125.59 0 bottom
U$190  [EXTERNAL0]  89.87,125.59 0 bottom
U$191  [EC10]  104.87,127.59 0 top
U$192  [EC21]  95.87,127.59 0 top
U$193  [USB0]  80.87,120.59 0 top
U$194  [EXT10]  100.87,115.59 90 top
U$195  [EXT22]  62.87,115.59 90 top
U$196  [NMEA1]  110.87,115.99 90 top
U$197  [RADIO3]  72.87,115.99 90 top
U$198  [RTK5#SVG0]  86.87,128.59 0 top
U$199  [RTK5#SVG0]  86.87,118.59 0 bottom
U$200  [RTK_FACET0]  86.27,127.89 0 bottom
U$201  [#RX2#2]  15.86,147.04 90 top
U$202  [#TX2#1]  13.26,147.14 90 top
U$203  [#GND#0]  18.36,147.14 90 top
U$204  [#3#5#5V#0]  10.76,147.14 90 top
U$205  [#3V3#0]  48.76,147.14 90 top
U$206  [#TX1#1]  51.26,147.14 90 top
U$207  [#RX1#2]  53.76,147.14 90 top
U$208  [#GND#0]  56.36,147.14 90 top
U$209  [CONNECTORS1]  28.36,151.64 0 bottom
U$210  [EXTERNAL0]  36.36,151.64 0 bottom
U$211  [EC10]  51.36,153.64 0 top
U$212  [EC21]  42.36,153.64 0 top
U$213  [USB0]  27.36,146.64 0 top
U$214  [EXT10]  47.36,141.64 90 top
U$215  [EXT22]  9.36,141.64 90 top
U$216  [NMEA1]  57.36,142.04 90 top
U$217  [RADIO3]  19.36,142.04 90 top
U$218  [RTK5#SVG0]  33.36,154.64 0 top
U$219  [RTK5#SVG0]  33.36,144.64 0 bottom
U$220  [RTK_FACET0]  32.76,153.94 0 bottom
U$221  [#RX2#2]  69.37,147.04 90 top
U$222  [#TX2#1]  66.77,147.14 90 top
U$223  [#GND#0]  71.87,147.14 90 top
U$224  [#3#5#5V#0]  64.27,147.14 90 top
U$225  [#3V3#0]  102.27,147.14 90 top
U$226  [#TX1#1]  104.77,147.14 90 top
U$227  [#RX1#2]  107.27,147.14 90 top
U$228  [#GND#0]  109.87,147.14 90 top
U$229  [CONNECTORS1]  81.87,151.64 0 bottom
U$230  [EXTERNAL0]  89.87,151.64 0 bottom
U$231  [EC10]  104.87,153.64 0 top
U$232  [EC21]  95.87,153.64 0 top
U$233  [USB0]  80.87,146.64 0 top
U$234  [EXT10]  100.87,141.64 90 top
U$235  [EXT22]  62.87,141.64 90 top
U$236  [NMEA1]  110.87,142.04 90 top
U$237  [RADIO3]  72.87,142.04 90 top
U$238  [RTK5#SVG0]  86.87,154.64 0 top
U$239  [RTK5#SVG0]  86.87,144.64 0 bottom
U$240  [RTK_FACET0]  86.27,153.94 0 bottom
U$241  [#RX2#2]  15.86,173.09 90 top
U$242  [#TX2#1]  13.26,173.19 90 top
U$243  [#GND#0]  18.36,173.19 90 top
U$244  [#3#5#5V#0]  10.76,173.19 90 top
U$245  [#3V3#0]  48.76,173.19 90 top
U$246  [#TX1#1]  51.26,173.19 90 top
U$247  [#RX1#2]  53.76,173.19 90 top
U$248  [#GND#0]  56.36,173.19 90 top
U$249  [CONNECTORS1]  28.36,177.69 0 bottom
U$250  [EXTERNAL0]  36.36,177.69 0 bottom
U$251  [EC10]  51.36,179.69 0 top
U$252  [EC21]  42.36,179.69 0 top
U$253  [USB0]  27.36,172.69 0 top
U$254  [EXT10]  47.36,167.69 90 top
U$255  [EXT22]  9.36,167.69 90 top
U$256  [NMEA1]  57.36,168.09 90 top
U$257  [RADIO3]  19.36,168.09 90 top
U$258  [RTK5#SVG0]  33.36,180.69 0 top
U$259  [RTK5#SVG0]  33.36,170.69 0 bottom
U$260  [RTK_FACET0]  32.76,179.99 0 bottom
U$261  [#RX2#2]  69.37,173.09 90 top
U$262  [#TX2#1]  66.77,173.19 90 top
U$263  [#GND#0]  71.87,173.19 90 top
U$264  [#3#5#5V#0]  64.27,173.19 90 top
U$265  [#3V3#0]  102.27,173.19 90 top
U$266  [#TX1#1]  104.77,173.19 90 top
U$267  [#RX1#2]  107.27,173.19 90 top
U$268  [#GND#0]  109.87,173.19 90 top
U$269  [CONNECTORS1]  81.87,177.69 0 bottom
U$270  [EXTERNAL0]  89.87,177.69 0 bottom
U$271  [EC10]  104.87,179.69 0 top
U$272  [EC21]  95.87,179.69 0 top
U$273  [USB0]  80.87,172.69 0 top
U$274  [EXT10]  100.87,167.69 90 top
U$275  [EXT22]  62.87,167.69 90 top
U$276  [NMEA1]  110.87,168.09 90 top
U$277  [RADIO3]  72.87,168.09 90 top
U$278  [RTK5#SVG0]  86.87,180.69 0 top
U$279  [RTK5#SVG0]  86.87,170.69 0 bottom
U$280  [RTK_FACET0]  86.27,179.99 0 bottom

## Library data of the parts
D1-D14 = SparkFun-IC-Power; PROD_ID: DIO-14084
E$1-E$4 JP1-JP53 JP61 JP71 JP81 LOGO1-LOGO42 = SparkFun-Aesthetics
E$5 E$6 = SparkFun-Retired
F1 F2 F5 F7 F9 F11 F13 F15 F17 F19 F21 F23 F25 F27 = SparkFun-Fuses; PROD_ID: RES-13945
F3 F4 F6 F8 F10 F12 F14 F16 F18 F20 F22 F24 F26 F28 = SparkFun-Fuses; PROD_ID: RES-14313
J1 J6 J15 J16 J23 J24 J31 J32 J39 J40 J47 J48 J55 J56 J63 J64 J71 J72 J79 J80 J87 J88 J95 J96 J103 J104 J111 J112 = RTK Facet; PROD_ID: CONN-15766
J2 J8-J10 J19 J20 J27 J28 J35 J36 J43 J44 J51 J52 J59 J60 J67 J68 J75 J76 J83 J84 J91 J92 J99 J100 J107 J108 = SparkFun-Connectors; PROD_ID: CONN-15303
J3 J4 J17 J25 J33 J41 J49 J57 J65 J73 J81 J89 J97 J105 = SparkFun-Connectors; PROD_ID: CONN-13694; VALUE: Qwiic Right Angle
J5 J7 J18 J26 J34 J42 J50 J58 J66 J74 J82 J90 J98 J106 = SparkFun-Connectors; PROD_ID: CONN-14122
J11-J14 J21 J22 J29 J30 J37 J38 J45 J46 J53 J54 J61 J62 J69 J70 J77 J78 J85 J86 J93 J94 J101 J102 J109 J110 = SparkFun-Connectors
MEAS MEAS1-MEAS13 = SparkFun-Jumpers
R1-R28 = SparkFun-Resistors; PROD_ID: RES-12083
U$1-U$280 = output

## Nets
3.3V [power]: J2.1 J4.2 J6.7 J6.8 J12.4
3.3V1 [power]: J3.2 J10.1 J14.4 J16.7 J16.8
3.3V2 [power]: J17.2 J20.1 J22.4 J24.7 J24.8
3.3V3 [power]: J25.2 J28.1 J30.4 J32.7 J32.8
3.3V4 [power]: J33.2 J36.1 J38.4 J40.7 J40.8
3.3V5 [power]: J41.2 J44.1 J46.4 J48.7 J48.8
3.3V6 [power]: J49.2 J52.1 J54.4 J56.7 J56.8
3.3V7 [power]: J57.2 J60.1 J62.4 J64.7 J64.8
3.3V8 [power]: J65.2 J68.1 J70.4 J72.7 J72.8
3.3V9 [power]: J73.2 J76.1 J78.4 J80.7 J80.8
3.3V10 [power]: J81.2 J84.1 J86.4 J88.7 J88.8
3.3V11 [power]: J89.2 J92.1 J94.4 J96.7 J96.8
3.3V12 [power]: J97.2 J100.1 J102.4 J104.7 J104.8
3.3V13 [power]: J105.2 J108.1 J110.4 J112.7 J112.8
CC1: J5.A5 R17.2
CC2: J5.B5 R16.2
CC3: J7.A5 R2.2
CC4: J7.B5 R1.2
CC5: J18.A5 R4.2
CC6: J18.B5 R3.2
CC7: J26.A5 R6.2
CC8: J26.B5 R5.2
CC9: J34.A5 R8.2
CC10: J34.B5 R7.2
CC11: J42.A5 R10.2
CC12: J42.B5 R9.2
CC13: J50.A5 R12.2
CC14: J50.B5 R11.2
CC15: J58.A5 R14.2
CC16: J58.B5 R13.2
CC17: J66.A5 R18.2
CC18: J66.B5 R15.2
CC19: J74.A5 R20.2
CC20: J74.B5 R19.2
CC21: J82.A5 R22.2
CC22: J82.B5 R21.2
CC23: J90.A5 R24.2
CC24: J90.B5 R23.2
CC25: J98.A5 R26.2
CC26: J98.B5 R25.2
CC27: J106.A5 R28.2
CC28: J106.B5 R27.2
ESP_21/SDA: J4.3 J6.9
ESP_21/SDA1: J3.3 J16.9
ESP_21/SDA2: J17.3 J24.9
ESP_21/SDA3: J25.3 J32.9
ESP_21/SDA4: J33.3 J40.9
ESP_21/SDA5: J41.3 J48.9
ESP_21/SDA6: J49.3 J56.9
ESP_21/SDA7: J57.3 J64.9
ESP_21/SDA8: J65.3 J72.9
ESP_21/SDA9: J73.3 J80.9
ESP_21/SDA10: J81.3 J88.9
ESP_21/SDA11: J89.3 J96.9
ESP_21/SDA12: J97.3 J104.9
ESP_21/SDA13: J105.3 J112.9
ESP_22/SCL: J4.4 J6.10
ESP_22/SCL1: J3.4 J16.10
ESP_22/SCL2: J17.4 J24.10
ESP_22/SCL3: J25.4 J32.10
ESP_22/SCL4: J33.4 J40.10
ESP_22/SCL5: J41.4 J48.10
ESP_22/SCL6: J49.4 J56.10
ESP_22/SCL7: J57.4 J64.10
ESP_22/SCL8: J65.4 J72.10
ESP_22/SCL9: J73.4 J80.10
ESP_22/SCL10: J81.4 J88.10
ESP_22/SCL11: J89.4 J96.10
ESP_22/SCL12: J97.4 J104.10
ESP_22/SCL13: J105.4 J112.10
EXTERNAL_SERIAL1_RXI: J2.3 J6.12 J12.2
EXTERNAL_SERIAL1_RXI1: J10.3 J14.2 J16.12
EXTERNAL_SERIAL1_RXI2: J20.3 J22.2 J24.12
EXTERNAL_SERIAL1_RXI3: J28.3 J30.2 J32.12
EXTERNAL_SERIAL1_RXI4: J36.3 J38.2 J40.12
EXTERNAL_SERIAL1_RXI5: J44.3 J46.2 J48.12
EXTERNAL_SERIAL1_RXI6: J52.3 J54.2 J56.12
EXTERNAL_SERIAL1_RXI7: J60.3 J62.2 J64.12
EXTERNAL_SERIAL1_RXI8: J68.3 J70.2 J72.12
EXTERNAL_SERIAL1_RXI9: J76.3 J78.2 J80.12
EXTERNAL_SERIAL1_RXI10: J84.3 J86.2 J88.12
EXTERNAL_SERIAL1_RXI11: J92.3 J94.2 J96.12
EXTERNAL_SERIAL1_RXI12: J100.3 J102.2 J104.12
EXTERNAL_SERIAL1_RXI13: J108.3 J110.2 J112.12
EXTERNAL_SERIAL1_TXO: J2.2 J6.11 J12.3
EXTERNAL_SERIAL1_TXO1: J10.2 J14.3 J16.11
EXTERNAL_SERIAL1_TXO2: J20.2 J22.3 J24.11
EXTERNAL_SERIAL1_TXO3: J28.2 J30.3 J32.11
EXTERNAL_SERIAL1_TXO4: J36.2 J38.3 J40.11
EXTERNAL_SERIAL1_TXO5: J44.2 J46.3 J48.11
EXTERNAL_SERIAL1_TXO6: J52.2 J54.3 J56.11
EXTERNAL_SERIAL1_TXO7: J60.2 J62.3 J64.11
EXTERNAL_SERIAL1_TXO8: J68.2 J70.3 J72.11
EXTERNAL_SERIAL1_TXO9: J76.2 J78.3 J80.11
EXTERNAL_SERIAL1_TXO10: J84.2 J86.3 J88.11
EXTERNAL_SERIAL1_TXO11: J92.2 J94.3 J96.11
EXTERNAL_SERIAL1_TXO12: J100.2 J102.3 J104.11
EXTERNAL_SERIAL1_TXO13: J108.2 J110.3 J112.11
GND: D6.2 J1.1 J1.2 J1.3 J2.4 J4.1 J5.GND J5.GND2 J5.SHLD1 J5.SHLD2 J5.SHLD3 J5.SHLD4 J6.1 J6.2 J9.4 J11.1 J12.1 R16.1 R17.1
GND1: D1.2 J3.1 J7.GND J7.GND2 J7.SHLD1 J7.SHLD2 J7.SHLD3 J7.SHLD4 J8.4 J10.4 J13.1 J14.1 J15.1 J15.2 J15.3 J16.1 J16.2 R1.1 R2.1
GND2: D2.2 J17.1 J18.GND J18.GND2 J18.SHLD1 J18.SHLD2 J18.SHLD3 J18.SHLD4 J19.4 J20.4 J21.1 J22.1 J23.1 J23.2 J23.3 J24.1 J24.2 R3.1 R4.1
GND3: D3.2 J25.1 J26.GND J26.GND2 J26.SHLD1 J26.SHLD2 J26.SHLD3 J26.SHLD4 J27.4 J28.4 J29.1 J30.1 J31.1 J31.2 J31.3 J32.1 J32.2 R5.1 R6.1
GND4: D4.2 J33.1 J34.GND J34.GND2 J34.SHLD1 J34.SHLD2 J34.SHLD3 J34.SHLD4 J35.4 J36.4 J37.1 J38.1 J39.1 J39.2 J39.3 J40.1 J40.2 R7.1 R8.1
GND5: D5.2 J41.1 J42.GND J42.GND2 J42.SHLD1 J42.SHLD2 J42.SHLD3 J42.SHLD4 J43.4 J44.4 J45.1 J46.1 J47.1 J47.2 J47.3 J48.1 J48.2 R9.1 R10.1
GND6: D7.2 J49.1 J50.GND J50.GND2 J50.SHLD1 J50.SHLD2 J50.SHLD3 J50.SHLD4 J51.4 J52.4 J53.1 J54.1 J55.1 J55.2 J55.3 J56.1 J56.2 R11.1 R12.1
GND7: D8.2 J57.1 J58.GND J58.GND2 J58.SHLD1 J58.SHLD2 J58.SHLD3 J58.SHLD4 J59.4 J60.4 J61.1 J62.1 J63.1 J63.2 J63.3 J64.1 J64.2 R13.1 R14.1
GND8: D9.2 J65.1 J66.GND J66.GND2 J66.SHLD1 J66.SHLD2 J66.SHLD3 J66.SHLD4 J67.4 J68.4 J69.1 J70.1 J71.1 J71.2 J71.3 J72.1 J72.2 R15.1 R18.1
GND9: D10.2 J73.1 J74.GND J74.GND2 J74.SHLD1 J74.SHLD2 J74.SHLD3 J74.SHLD4 J75.4 J76.4 J77.1 J78.1 J79.1 J79.2 J79.3 J80.1 J80.2 R19.1 R20.1
GND10: D11.2 J81.1 J82.GND J82.GND2 J82.SHLD1 J82.SHLD2 J82.SHLD3 J82.SHLD4 J83.4 J84.4 J85.1 J86.1 J87.1 J87.2 J87.3 J88.1 J88.2 R21.1 R22.1
GND11: D12.2 J89.1 J90.GND J90.GND2 J90.SHLD1 J90.SHLD2 J90.SHLD3 J90.SHLD4 J91.4 J92.4 J93.1 J94.1 J95.1 J95.2 J95.3 J96.1 J96.2 R23.1 R24.1
GND12: D13.2 J97.1 J98.GND J98.GND2 J98.SHLD1 J98.SHLD2 J98.SHLD3 J98.SHLD4 J99.4 J100.4 J101.1 J102.1 J103.1 J103.2 J103.3 J104.1 J104.2 R25.1 R26.1
GND13: D14.2 J105.1 J106.GND J106.GND2 J106.SHLD1 J106.SHLD2 J106.SHLD3 J106.SHLD4 J107.4 J108.4 J109.1 J110.1 J111.1 J111.2 J111.3 J112.1 J112.2 R27.1 R28.1
N$1 [power]: F2.1 J8.1 J13.4
N$2 [power]: F5.1 J19.1 J21.4
N$3 [power]: F1.1 J9.1 J11.4
N$4 [power]: F7.1 J27.1 J29.4
N$5 [power]: F9.1 J35.1 J37.4
N$6 [power]: F11.1 J43.1 J45.4
N$7 [power]: F13.1 J51.1 J53.4
N$8 [power]: F15.1 J59.1 J61.4
N$9 [power]: F17.1 J67.1 J69.4
N$10 [power]: F19.1 J75.1 J77.4
N$11 [power]: F21.1 J83.1 J85.4
N$12 [power]: F23.1 J91.1 J93.4
N$13 [power]: F25.1 J99.1 J101.4
N$14 [power]: F27.1 J107.1 J109.4
USB1_D_M: D6.1 J5.A7 J5.B7
USB1_D_M1: D1.1 J7.A7 J7.B7
USB1_D_M2: D2.1 J18.A7 J18.B7
USB1_D_M3: D3.1 J26.A7 J26.B7
USB1_D_M4: D4.1 J34.A7 J34.B7
USB1_D_M5: D5.1 J42.A7 J42.B7
USB1_D_M6: D7.1 J50.A7 J50.B7
USB1_D_M7: D8.1 J58.A7 J58.B7
USB1_D_M8: D9.1 J66.A7 J66.B7
USB1_D_M9: D10.1 J74.A7 J74.B7
USB1_D_M10: D11.1 J82.A7 J82.B7
USB1_D_M11: D12.1 J90.A7 J90.B7
USB1_D_M12: D13.1 J98.A7 J98.B7
USB1_D_M13: D14.1 J106.A7 J106.B7
USB1_D_P: D6.3 J5.A6 J5.B6
USB1_D_P1: D1.3 J7.A6 J7.B6
USB1_D_P2: D2.3 J18.A6 J18.B6
USB1_D_P3: D3.3 J26.A6 J26.B6
USB1_D_P4: D4.3 J34.A6 J34.B6
USB1_D_P5: D5.3 J42.A6 J42.B6
USB1_D_P6: D7.3 J50.A6 J50.B6
USB1_D_P7: D8.3 J58.A6 J58.B6
USB1_D_P8: D9.3 J66.A6 J66.B6
USB1_D_P9: D10.3 J74.A6 J74.B6
USB1_D_P10: D11.3 J82.A6 J82.B6
USB1_D_P11: D12.3 J90.A6 J90.B6
USB1_D_P12: D13.3 J98.A6 J98.B6
USB1_D_P13: D14.3 J106.A6 J106.B6
USB_DM: D6.6 J6.5
USB_DM1: D1.6 J16.5
USB_DM2: D2.6 J24.5
USB_DM3: D3.6 J32.5
USB_DM4: D4.6 J40.5
USB_DM5: D5.6 J48.5
USB_DM6: D7.6 J56.5
USB_DM7: D8.6 J64.5
USB_DM8: D9.6 J72.5
USB_DM9: D10.6 J80.5
USB_DM10: D11.6 J88.5
USB_DM11: D12.6 J96.5
USB_DM12: D13.6 J104.5
USB_DM13: D14.6 J112.5
USB_DP: D6.4 J6.6
USB_DP1: D1.4 J16.6
USB_DP2: D2.4 J24.6
USB_DP3: D3.4 J32.6
USB_DP4: D4.4 J40.6
USB_DP5: D5.4 J48.6
USB_DP6: D7.4 J56.6
USB_DP7: D8.4 J64.6
USB_DP8: D9.4 J72.6
USB_DP9: D10.4 J80.6
USB_DP10: D11.4 J88.6
USB_DP11: D12.4 J96.6
USB_DP12: D13.4 J104.6
USB_DP13: D14.4 J112.6
V_BATT [power]: F1.2 J1.4 J1.5 J1.6 J1.7
V_BATT1 [power]: F2.2 J15.4 J15.5 J15.6 J15.7
V_BATT2 [power]: F5.2 J23.4 J23.5 J23.6 J23.7
V_BATT3 [power]: F7.2 J31.4 J31.5 J31.6 J31.7
V_BATT4 [power]: F9.2 J39.4 J39.5 J39.6 J39.7
V_BATT5 [power]: F11.2 J47.4 J47.5 J47.6 J47.7
V_BATT6 [power]: F13.2 J55.4 J55.5 J55.6 J55.7
V_BATT7 [power]: F15.2 J63.4 J63.5 J63.6 J63.7
V_BATT8 [power]: F17.2 J71.4 J71.5 J71.6 J71.7
V_BATT9 [power]: F19.2 J79.4 J79.5 J79.6 J79.7
V_BATT10 [power]: F21.2 J87.4 J87.5 J87.6 J87.7
V_BATT11 [power]: F23.2 J95.4 J95.5 J95.6 J95.7
V_BATT12 [power]: F25.2 J103.4 J103.5 J103.6 J103.7
V_BATT13 [power]: F27.2 J111.4 J111.5 J111.6 J111.7
V_USB [power]: F3.2 J1.9 J1.10 J1.11 J1.12
V_USB1 [power]: F4.2 J15.9 J15.10 J15.11 J15.12
V_USB2 [power]: F6.2 J23.9 J23.10 J23.11 J23.12
V_USB3 [power]: F8.2 J31.9 J31.10 J31.11 J31.12
V_USB4 [power]: F10.2 J39.9 J39.10 J39.11 J39.12
V_USB5 [power]: F12.2 J47.9 J47.10 J47.11 J47.12
V_USB6 [power]: F14.2 J55.9 J55.10 J55.11 J55.12
V_USB7 [power]: F16.2 J63.9 J63.10 J63.11 J63.12
V_USB8 [power]: F18.2 J71.9 J71.10 J71.11 J71.12
V_USB9 [power]: F20.2 J79.9 J79.10 J79.11 J79.12
V_USB10 [power]: F22.2 J87.9 J87.10 J87.11 J87.12
V_USB11 [power]: F24.2 J95.9 J95.10 J95.11 J95.12
V_USB12 [power]: F26.2 J103.9 J103.10 J103.11 J103.12
V_USB13 [power]: F28.2 J111.9 J111.10 J111.11 J111.12
VIN [power]: J5.VBUS1 J5.VBUS2 MEAS.1 MEAS.3
VIN1 [power]: D6.5 F3.1 MEAS.2 MEAS.4
VIN2 [power]: J7.VBUS1 J7.VBUS2 MEAS1.1 MEAS1.3
VIN3 [power]: D1.5 F4.1 MEAS1.2 MEAS1.4
VIN4 [power]: J18.VBUS1 J18.VBUS2 MEAS2.1 MEAS2.3
VIN5 [power]: D2.5 F6.1 MEAS2.2 MEAS2.4
VIN6 [power]: J26.VBUS1 J26.VBUS2 MEAS3.1 MEAS3.3
VIN7 [power]: D3.5 F8.1 MEAS3.2 MEAS3.4
VIN8 [power]: J34.VBUS1 J34.VBUS2 MEAS4.1 MEAS4.3
VIN9 [power]: D4.5 F10.1 MEAS4.2 MEAS4.4
VIN10 [power]: J42.VBUS1 J42.VBUS2 MEAS5.1 MEAS5.3
VIN11 [power]: D5.5 F12.1 MEAS5.2 MEAS5.4
VIN12 [power]: J50.VBUS1 J50.VBUS2 MEAS6.1 MEAS6.3
VIN13 [power]: D7.5 F14.1 MEAS6.2 MEAS6.4
VIN14 [power]: J58.VBUS1 J58.VBUS2 MEAS7.1 MEAS7.3
VIN15 [power]: D8.5 F16.1 MEAS7.2 MEAS7.4
VIN16 [power]: J66.VBUS1 J66.VBUS2 MEAS8.1 MEAS8.3
VIN17 [power]: D9.5 F18.1 MEAS8.2 MEAS8.4
VIN18 [power]: J74.VBUS1 J74.VBUS2 MEAS9.1 MEAS9.3
VIN19 [power]: D10.5 F20.1 MEAS9.2 MEAS9.4
VIN20 [power]: J82.VBUS1 J82.VBUS2 MEAS10.1 MEAS10.3
VIN21 [power]: D11.5 F22.1 MEAS10.2 MEAS10.4
VIN22 [power]: J90.VBUS1 J90.VBUS2 MEAS11.1 MEAS11.3
VIN23 [power]: D12.5 F24.1 MEAS11.2 MEAS11.4
VIN24 [power]: J98.VBUS1 J98.VBUS2 MEAS12.1 MEAS12.3
VIN25 [power]: D13.5 F26.1 MEAS12.2 MEAS12.4
VIN26 [power]: J106.VBUS1 J106.VBUS2 MEAS13.1 MEAS13.3
VIN27 [power]: D14.5 F28.1 MEAS13.2 MEAS13.4
ZED-RXI1: J8.3 J13.2 J16.4
ZED-RXI2: J6.4 J9.3 J11.2
ZED-RXI3: J19.3 J21.2 J24.4
ZED-RXI4: J27.3 J29.2 J32.4
ZED-RXI5: J35.3 J37.2 J40.4
ZED-RXI6: J43.3 J45.2 J48.4
ZED-RXI7: J51.3 J53.2 J56.4
ZED-RXI8: J59.3 J61.2 J64.4
ZED-RXI9: J67.3 J69.2 J72.4
ZED-RXI10: J75.3 J77.2 J80.4
ZED-RXI11: J83.3 J85.2 J88.4
ZED-RXI12: J91.3 J93.2 J96.4
ZED-RXI13: J99.3 J101.2 J104.4
ZED-RXI14: J107.3 J109.2 J112.4
ZED-TXO1: J8.2 J13.3 J16.3
ZED-TXO2: J6.3 J9.2 J11.3
ZED-TXO3: J19.2 J21.3 J24.3
ZED-TXO4: J27.2 J29.3 J32.3
ZED-TXO5: J35.2 J37.3 J40.3
ZED-TXO6: J43.2 J45.3 J48.3
ZED-TXO7: J51.2 J53.3 J56.3
ZED-TXO8: J59.2 J61.3 J64.3
ZED-TXO9: J67.2 J69.3 J72.3
ZED-TXO10: J75.2 J77.3 J80.3
ZED-TXO11: J83.2 J85.3 J88.3
ZED-TXO12: J91.2 J93.3 J96.3
ZED-TXO13: J99.2 J101.3 J104.3
ZED-TXO14: J107.2 J109.3 J112.3